# Altium PCB ControlPCB.PcbDoc
Units mil, origin at the board's own origin, x right, y up, seen from the top; angles counter-clockwise.
Board outline 1995 x 2235 mil, 2 copper layers (Top Layer, Bottom Layer); 21 components, 27 nets, 95 pads, 2 vias.
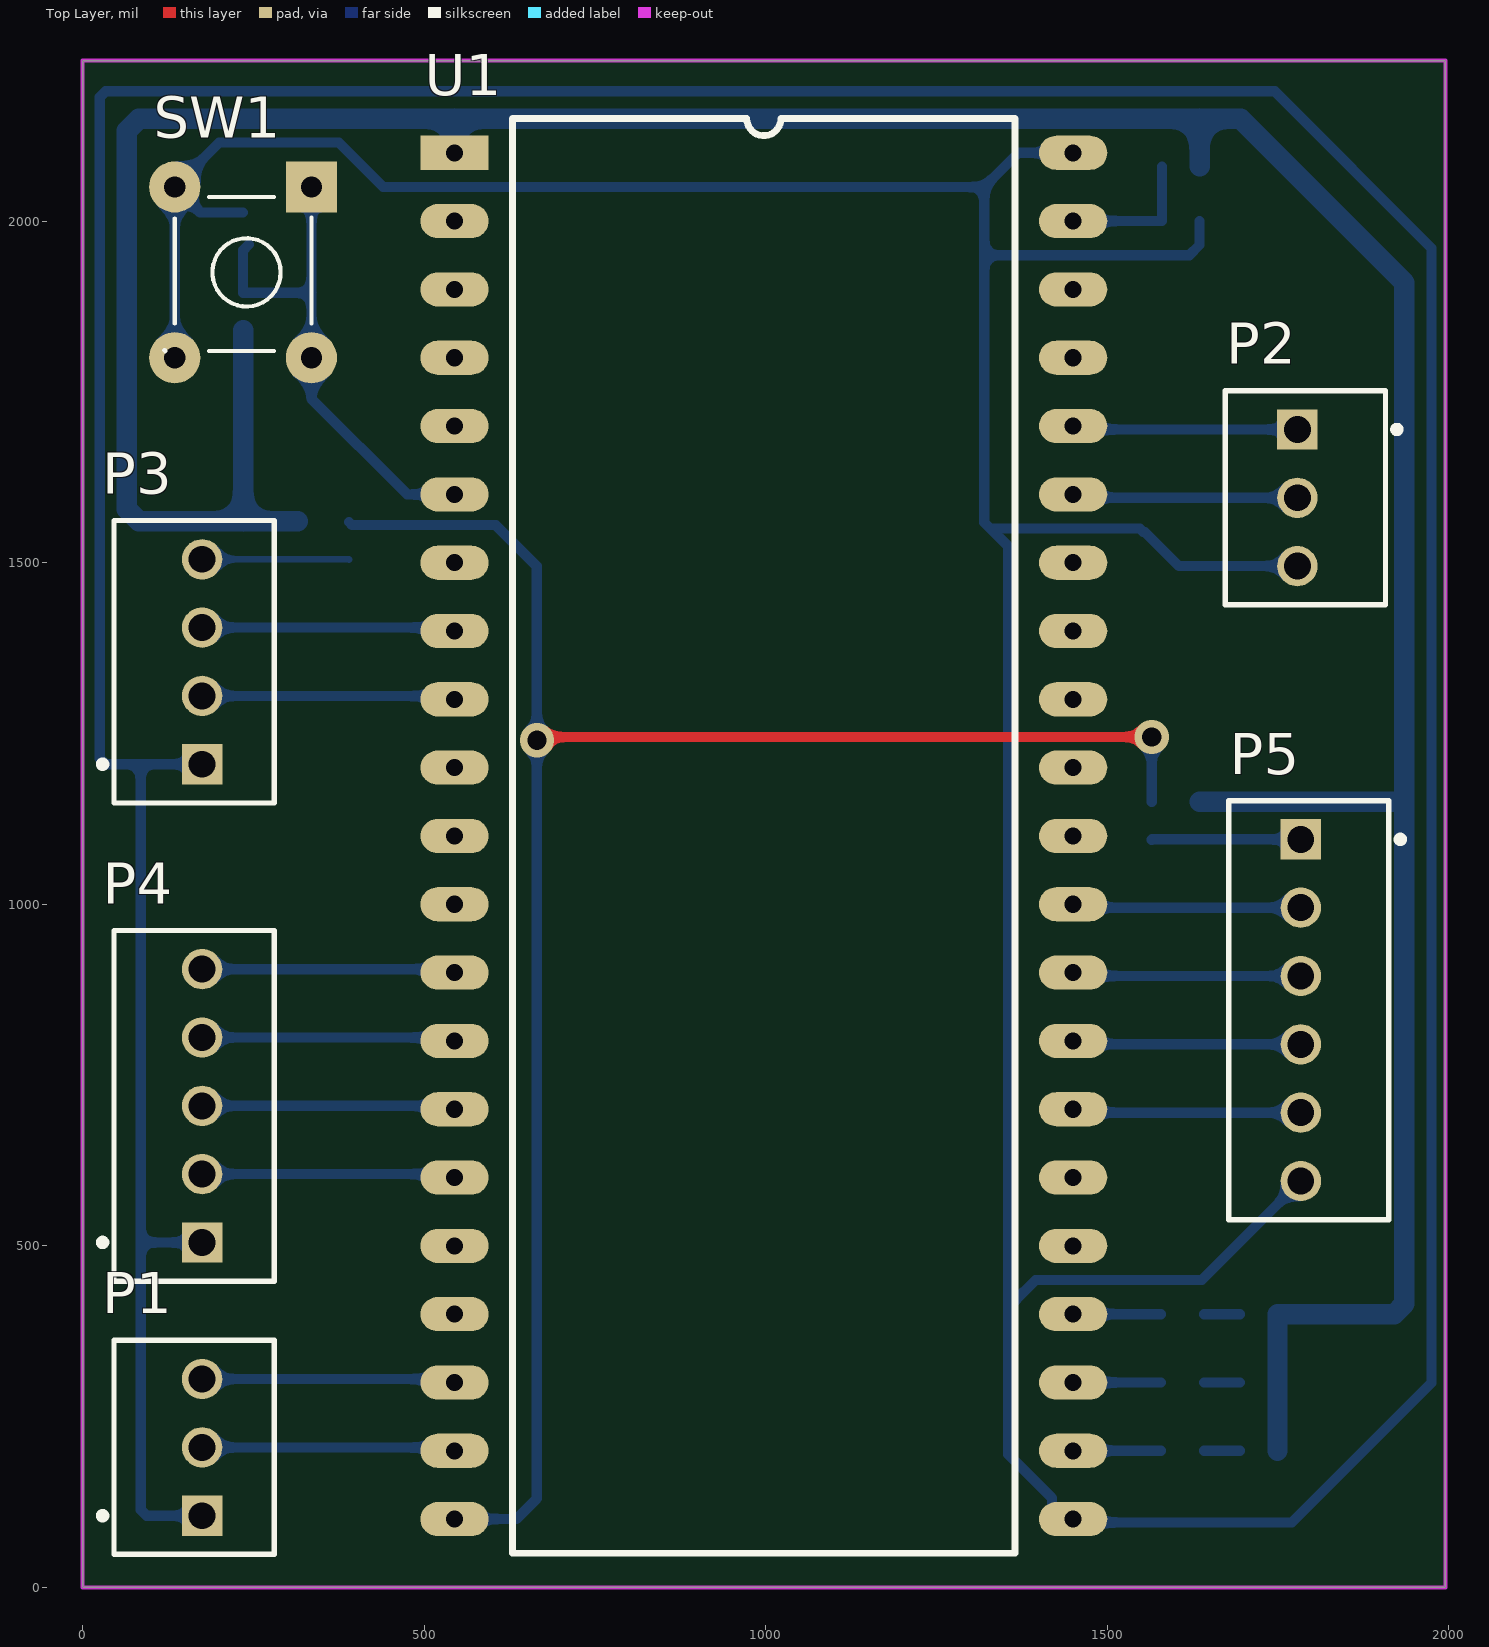
[diagram p0: Top Layer view]
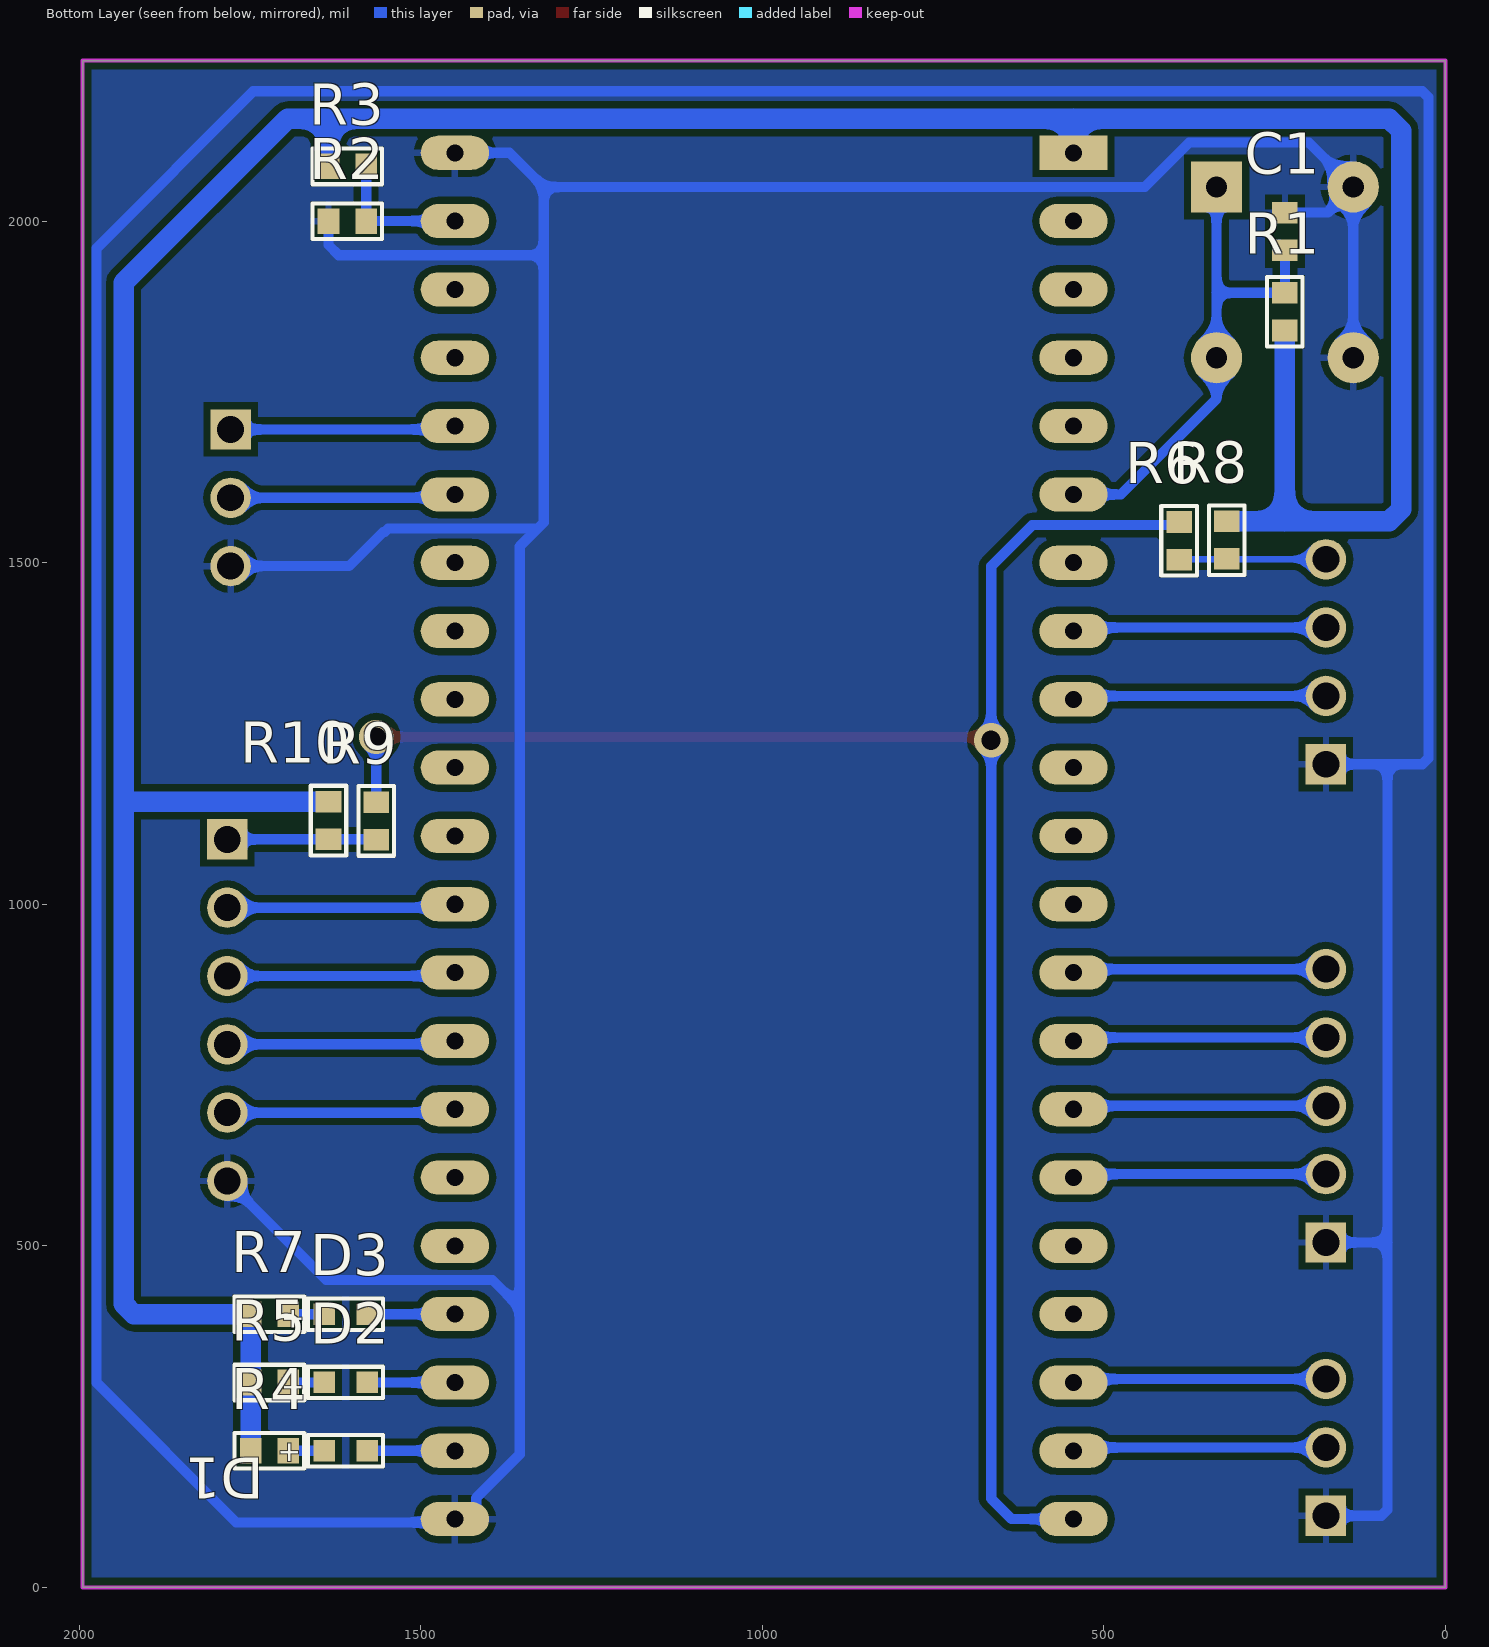
[diagram p1: Bottom Layer view, seen from below]
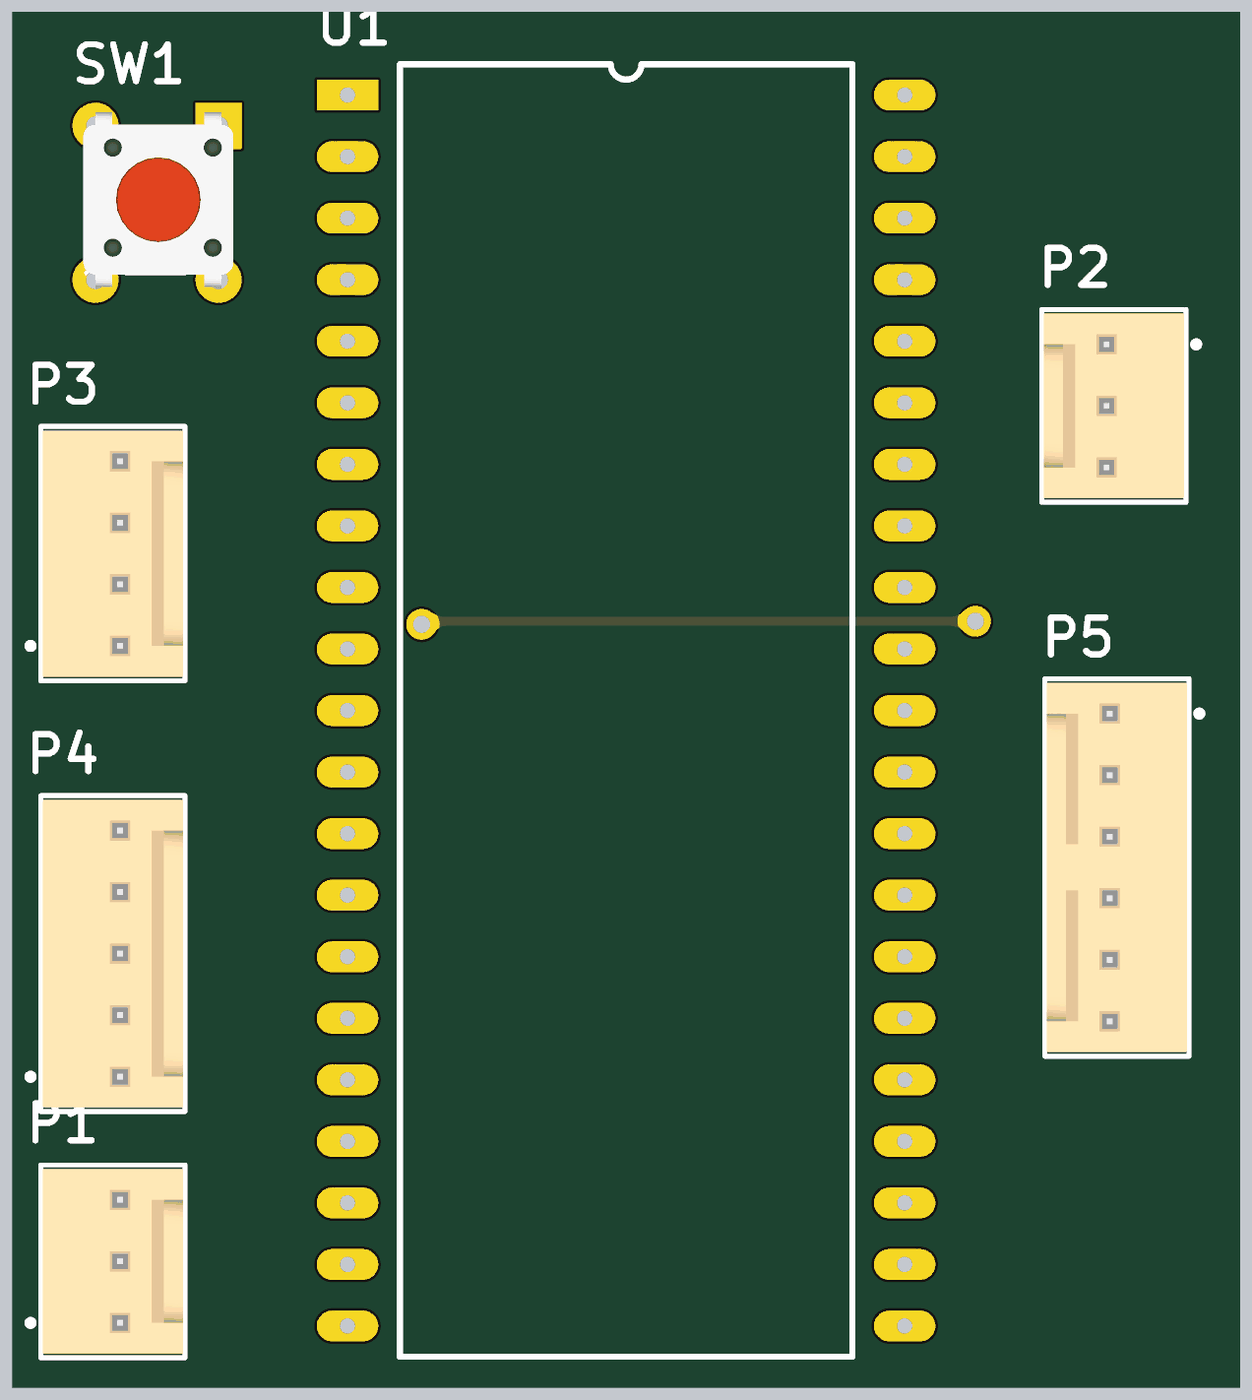
[diagram p2: 3D render of the assembled board from above, using the file's embedded part models]
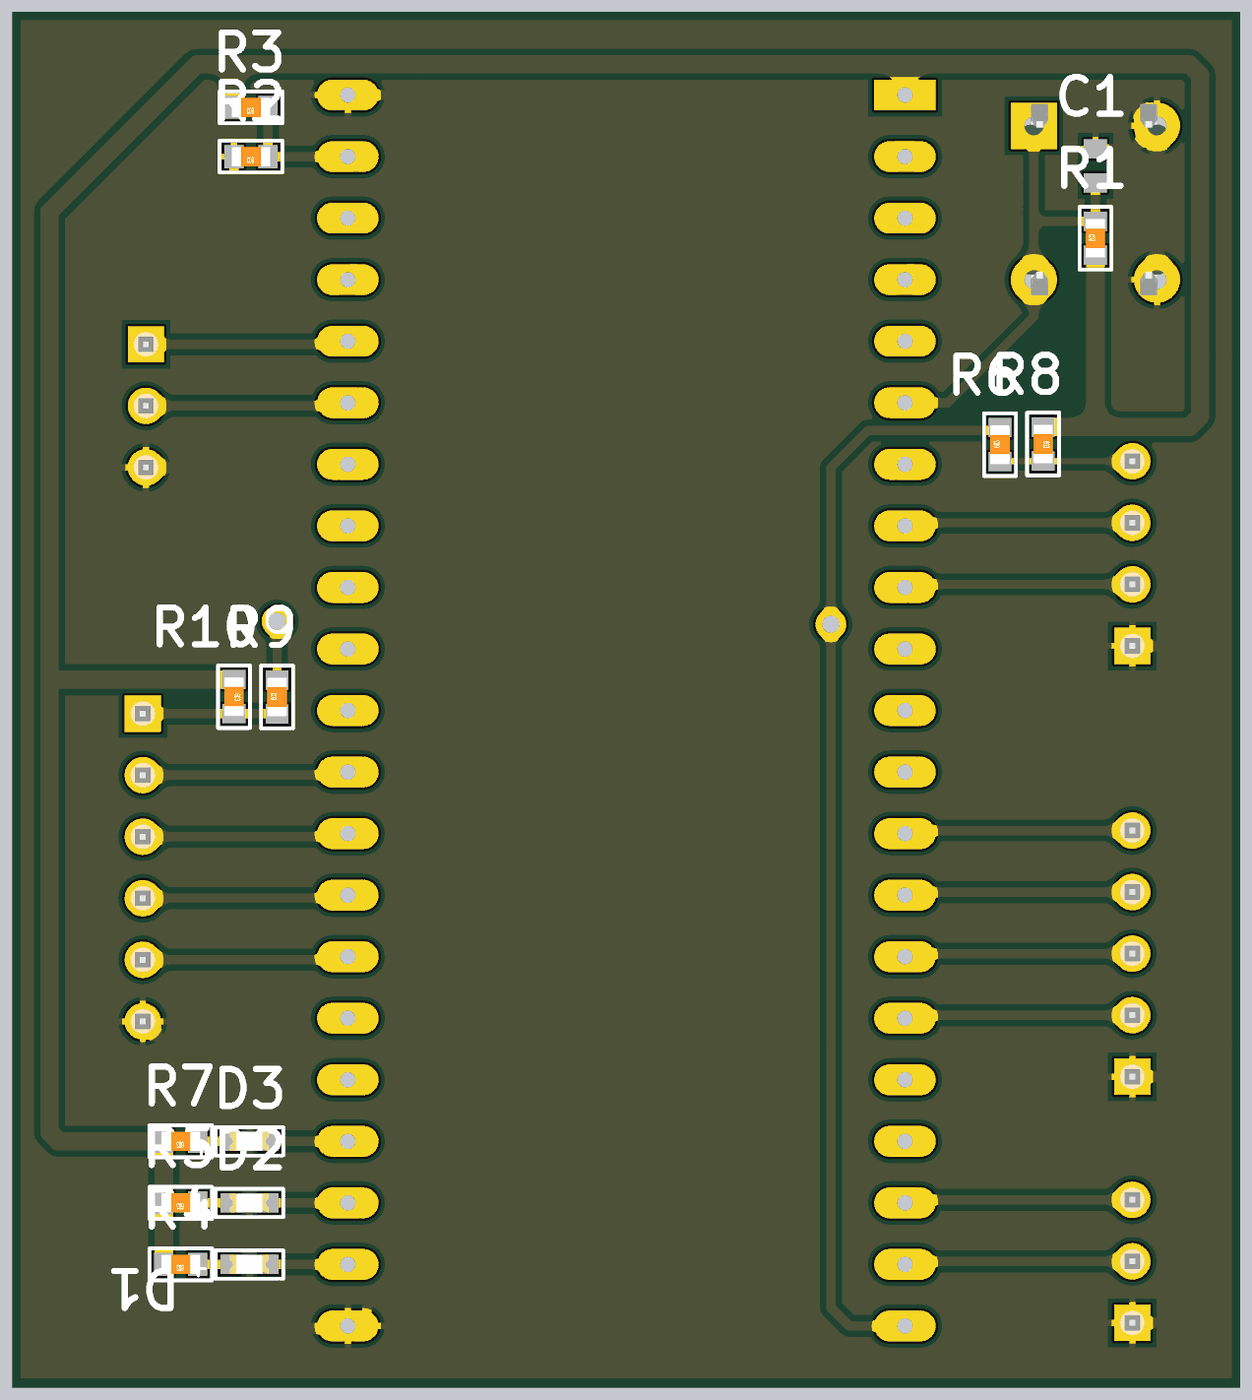
[diagram p3: 3D render of the assembled board from below, using the file's embedded part models]

## Layer stack, top to bottom
Top Solder: solder mask 0.4, Solder Resist, Dk 3.5
Top Layer: signal copper 1.4
Dielectric 1: dielectric 12.6, FR-4, Dk 4.8
Bottom Layer: signal copper 1.4
Bottom Solder: solder mask 0.4, Solder Resist, Dk 3.5

## Board outline
0,0 0,2235 1995,2235 1995,0

## Design rules (kind name [scope] priority, off if disabled: settings)
Clearance [All] p1: gap=10 ignorepadtopadclearanceinfootprint=FALSE
PolygonConnect [All] p1: connectstyle=Relief reliefconductorwidth=10 reliefentries=4 polygonreliefangle="90 Angle" airgapwidth=10
RoutingVias [All] p1: holewidth=28 width=50 viastyle="Through Hole" minholewidth=28 minwidth=50 maxholewidth=28 maxwidth=50
SolderMaskExpansion [All] p1: expansion=4 istentingtop=FALSE
Width [All] p1: maxlimit=30 minlimit=10 preferedwidth=15
30 further rules are at their usual default settings.

## Components (designator, comment, footprint, x,y, rotation, side; value= is the part's Value field where it differs from the comment)
C1 "Cap Non-Pol SMD" CAP-SM-0603 235,1985 r90 bottom value=100nF
D1 "Amber, 2V" WL-SMCW_0603_H=0.7mm 1610,200 r0 bottom
D2 "Red, 2V" WL-SMCW_0603_H=0.7mm 1610,300 r0 bottom
D3 "Blue, 3.2V" WL-SMCW_0603_H=0.7mm 1610,400 r0 bottom
P1 "61900311121" 61900311121 163.19,205 r270 top
P2 "61900311121" 61900311121 1790,1595 r90 top
P3 "61900411121" 61900411121 163.19,1355 r270 top
P4 "61900511121" 61900511121 163.19,705 r270 top
P5 "61900611121" 61900611121 1795,845 r90 top
R1 "RESISTOR SMD" RES-SM-0603 235,1840.44 r90 bottom value=10K
R2 "RESISTOR SMD" RES-SM-0603 1580.44,2000 r0 bottom value=DNM
R3 "RESISTOR SMD" RES-SM-0603 1580.44,2080 r0 bottom value=DNM
R4 "RESISTOR SMD" RES-SM-0603 1694.56,200 r0 bottom value=330
R5 "RESISTOR SMD" RES-SM-0603 1694.56,300 r0 bottom value=330
R6 "RESISTOR SMD" RES-SM-0603 390,1505 r90 bottom value=0
R7 "RESISTOR SMD" RES-SM-0603 1694.56,400 r0 bottom value=330
R8 "RESISTOR SMD" RES-SM-0603 320,1560 r270 bottom value=DNM
R9 "RESISTOR SMD" RES-SM-0603 1565,1095 r90 bottom value=0
R10 "RESISTOR SMD" RES-SM-0603 1635,1149.56 r270 bottom value=DNM
SW1 "SW" "Tact SW 4 pin" 335,2050 r270 top value="Button chip 4 pin"
U1 "ESP32_S2" ESP32_S2 544.49,2100 r0 top

## Footprints (in the part's own frame and the unit in brackets; to place one, negate y for a bottom-side part, rotate by r counter-clockwise, add the part's x,y. Pads: shape width x height; smd on the part's side, far side on the other; paste and mask are expansions set on the pad)
61900311121 [mm] "2.54mm Male Locking Header, 3p"
  rect 1.5x1.5 hole 1: 1(2.54,0.3)
  round 1.5 hole 1: 2(0,0.3) 3(-2.54,0.3)
  silkscreen extent -3.98,-3.52 3.98,2.98, body extent -3.81,-2.9 3.81,2.9, height 11.53
61900411121 [mm] "2.54mm Male Locking Header, 4p"
  rect 1.5x1.5 hole 1: 1(3.81,0.3)
  round 1.5 hole 1: 2(1.27,0.3) 3(-1.27,0.3) 4(-3.81,0.3)
  silkscreen extent -5.25,-3.52 5.25,2.98, body extent -5.08,-2.9 5.08,2.9, height 11.53
61900511121 [mm] "2.54mm Male Locking Header, 5p"
  rect 1.5x1.5 hole 1: 1(5.08,0.3)
  round 1.5 hole 1: 2(2.54,0.3) 3(0,0.3) 4(-2.54,0.3) 5(-5.08,0.3)
  silkscreen extent -6.52,-3.52 6.52,2.98, body extent -6.35,-2.9 6.35,2.9, height 11.53
61900611121 [mm] "2.54mm Male Locking Header, 6p"
  rect 1.5x1.5 hole 1: 1(6.35,0.3)
  round 1.5 hole 1: 2(3.81,0.3) 3(1.27,0.3) 4(-1.27,0.3) 5(-3.81,0.3) 6(-6.35,0.3)
  silkscreen extent -7.79,-3.52 7.79,2.98, body extent -7.62,-2.9 7.62,2.9, height 11.53
CAP-SM-0603 [mm] "SMD Ceramic Capacitor Size 0603"
  rect 0.8x0.95 smd: 1(-0.7,0) 2(0.7,0)
  body extent -0.85,-0.45 0.85,0.45, height 0.6
ESP32_S2 [mm]
  rect 2.54x1.27 hole 0.635: 1(0,0)
  oval 2.54x1.27 hole 0.635: 2(0,-2.54) 3(0,-5.08) 4(0,-7.62) 5(0,-10.16) 6(0,-12.7) 7(0,-15.24) 8(0,-17.78) 9(0,-20.32) 10(0,-22.86) 11(0,-25.4) 12(0,-27.94) 13(0,-30.48) 14(0,-33.02) 15(0,-35.56) 16(0,-38.1) 17(0,-40.64) 18(0,-43.18) 19(0,-45.72) 20(0,-48.26) 21(0,-50.8) 22(23,-50.8) 23(23,-48.26) 24(23,-45.72) 25(23,-43.18) 26(23,-40.64) 27(23,-38.1) 28(23,-35.56) 29(23,-33.02) 30(23,-30.48) 31(23,-27.94) 32(23,-25.4) 33(23,-22.86) 34(23,-20.32) 35(23,-17.78) 36(23,-15.24) 37(23,-12.7) 38(23,-10.16) 39(23,-7.62) 40(23,-5.08) 41(23,-2.54) 42(23,0)
  silkscreen extent 2.16,-52.07 20.84,1.27
RES-SM-0603 [mm]
  rect 0.8x0.95 smd: 1(-0.014,0) 2(1.386,0)
  silkscreen extent -0.61,-0.66 1.98,0.66, body extent -0.11,-0.4 1.49,0.4, height 0.3
"Tact SW 4 pin" [mil] "SW button 4pin, 250 x250 mil"
  rect 75x75 hole 31: 1(0,0)
  round 75 hole 31: 2(250,-200) 3(250,0) 4(0,-200)
  silkscreen extent 15,-215 240,0, body extent -36,-220 276,24, height 276
WL-SMCW_0603_H=0.7mm [mm] "SMD Mono-color Chip LED, body 1.6x0.8mm"
  rect 0.8x0.8 smd: 1(-0.8,0) 2(0.8,0)
  silkscreen extent -1.4,-0.58 1.4,0.58, body extent -0.8,-0.4 0.8,0.4, height 0.7

## Part data
C1: "Capacitor"
D1: library part 150060AS75000, "WL-SMCW SMT Mono-color Chip LED Waterclear, size 0603, Amber, 2V, 140deg", Emitting Color=Amber, Forward Voltage typ.=2V, Operating Temperature="-40 to +85degC", Chip Technology=AlInGaP, ComponentLink1Description=Manufacturer, ComponentLink1URL=http://www.we-online.de, ComponentLink2Description=Datasheet, ComponentLink2URL=https://www.we-online.com/catalog/datasheet/150060AS75000.pdf, Dominant Wavelength typ.=605nm, Luminous Intensity typ.=130mcd, Mounting Technology=SMT, Packaging="Tape and Reel", Part Number=150060AS75000, Peak Wavelength typ.=610nm, Published Date="December 2019", Publisher="Wurth Elektronik", Size=0603, Viewing Angle=140deg
D2: library part 150060RS75000, "WL-SMCW SMT Mono-color Chip LED Waterclear, size 0603, Red, 2V, 140deg", Emitting Color=Red, Forward Voltage typ.=2V, Operating Temperature="-40 to +85degC", Chip Technology=AlInGaP, ComponentLink1Description=Manufacturer, ComponentLink1URL=http://www.we-online.de, ComponentLink2Description=Datasheet, ComponentLink2URL=https://www.we-online.com/catalog/datasheet/150060RS75000.pdf, Dominant Wavelength typ.=625nm, Luminous Intensity typ.=250mcd, Mounting Technology=SMT, Packaging="Tape and Reel", Part Number=150060RS75000, Peak Wavelength typ.=630nm, Published Date="December 2019", Publisher="Wurth Elektronik", Size=0603, Viewing Angle=140deg
D3: library part 150060BS75000, "WL-SMCW SMT Mono-color Chip LED Waterclear, size 0603, Blue, 3.2V, 140deg", Emitting Color=Blue, Forward Voltage typ.=3.2V, Operating Temperature="-40 to +85degC", Chip Technology=InGaN, ComponentLink1Description=Manufacturer, ComponentLink1URL=http://www.we-online.de, ComponentLink2Description=Datasheet, ComponentLink2URL=https://www.we-online.com/catalog/datasheet/150060BS75000.pdf, Dominant Wavelength typ.=470nm, Luminous Intensity typ.=145mcd, Mounting Technology=SMT, Packaging="Tape and Reel", Part Number=150060BS75000, Peak Wavelength typ.=465nm, Published Date="December 2019", Publisher="Wurth Elektronik", Size=0603, Viewing Angle=140deg
P1 P2: "WR-WTB THT Male Vertical Locking Header, pitch 2.54mm, 3p", Contact Resistance=20mOhm, Operating Temperature="-40 to +105degC", Rated Current=3A, Withstanding Voltage=1000VAC, Working Voltage=250VAC, ComponentLink1Description=Manufacturer, ComponentLink1URL=http://www.we-online.de, ComponentLink2Description=Datasheet, ComponentLink2URL=https://www.we-online.com/catalog/datasheet/61900311121.pdf, Gender=Male, Mounting Technology=THT, Packaging=Bag, Part Number=61900311121, Pin Number=3, Pitch=2.54mm, Published Date="January 2020", Publisher="Wurth Elektronik", Type=Vertical
P3: "WR-WTB THT Male Vertical Locking Header, pitch 2.54mm, 4p", Contact Resistance=20mOhm, Operating Temperature="-40 to +105degC", Rated Current=3A, Withstanding Voltage=1000VAC, Working Voltage=250VAC, ComponentLink1Description=Manufacturer, ComponentLink1URL=http://www.we-online.de, ComponentLink2Description=Datasheet, ComponentLink2URL=https://www.we-online.com/catalog/datasheet/61900411121.pdf, Gender=Male, Mounting Technology=THT, Packaging=Bag, Part Number=61900411121, Pin Number=4, Pitch=2.54mm, Published Date="January 2020", Publisher="Wurth Elektronik", Type=Vertical
P4: "WR-WTB THT Male Vertical Locking Header, pitch 2.54mm, 5p", Contact Resistance=20mOhm, Operating Temperature="-40 to +105degC", Rated Current=3A, Withstanding Voltage=1000VAC, Working Voltage=250VAC, ComponentLink1Description=Manufacturer, ComponentLink1URL=http://www.we-online.de, ComponentLink2Description=Datasheet, ComponentLink2URL=https://www.we-online.com/catalog/datasheet/61900511121.pdf, Gender=Male, Mounting Technology=THT, Packaging=Bag, Part Number=61900511121, Pin Number=5, Pitch=2.54mm, Published Date="January 2020", Publisher="Wurth Elektronik", Type=Vertical
P5: "WR-WTB THT Male Vertical Locking Header, pitch 2.54mm, 6p", Contact Resistance=20mOhm, Operating Temperature="-40 to +105degC", Rated Current=3A, Withstanding Voltage=1000VAC, Working Voltage=250VAC, ComponentLink1Description=Manufacturer, ComponentLink1URL=http://www.we-online.de, ComponentLink2Description=Datasheet, ComponentLink2URL=https://www.we-online.com/catalog/datasheet/61900611121.pdf, Gender=Male, Mounting Technology=THT, Packaging=Bag, Part Number=61900611121, Pin Number=6, Pitch=2.54mm, Published Date="January 2020", Publisher="Wurth Elektronik", Type=Vertical
R1 R2 R3 R4 R5 R6 R7 R8 R9 R10: "Resistor"
SW1: library part "Tact SW - 4Pin", "Switch button 4 pin"

## Via types
v1: diameter 50, hole 28, Top Layer to Bottom Layer, 2 vias

## Nets (pads, with @x,y where several pads share a name; then routed paths per layer and width w, separated by ;. In a path a pad name is that pad's centre, name@x,y a point inside that pad or via, vN(x,y) a via of type N, cw(c..) or ccw(c..) an arc to the next point about the centre after c; other vN are vias at no path point)
3.3V: R1.1 R3.2 R4.2 R5.2 R7.2 R8.1 R10.1 U1.1 | length 5374.4
  Bottom Layer w30: R1.1 235,1560.56 ; R8.1@314.65,1560.56 235,1560.56 ; U1.1 544.49,2150 ; R10.1 1934.88,1150.12 1935,1150 ; R3.2 1635,2150 ; R4.2 R5.2 R7.2 1920,400 1935,415 1935,1150 ; 235,1560.56 82.57,1560.56 65,1578.13 65,2132.43 82.57,2150 544.49,2150 ; 544.49,2150 1635,2150 ; 1635,2150 1695,2150 1935,1910 1935,1150
+5: R6.2 R9.2 U1.21 | length 2797.2
  Top Layer w15: v1(665,1240) 670,1245 v1(1565,1245)
  Bottom Layer w15: R6.2 394.56,1555 605,1555 665,1495 v1(665,1240) 665,130 635,100 U1.21 ; R9.2 v1(1565,1245)
BTN_ESP32: C1.1 R1.2 SW1.1 SW1.3 U1.6 | length 751.6
  Bottom Layer w15: C1.1@243.25,1965.69 C1.1 R1.2 335,1895 ; SW1.1 335,1895 ; U1.6 475,1600 335,1740 SW1.3 335,1895
EN: R2.1 R3.1 U1.41 | length 209.9
  Bottom Layer w15: U1.41 R2.1 R3.1
GND: C1.2 P1.1 P2.3 P3.1 P4.1 P5.6 R2.2 SW1.2 SW1.4 U1.22 U1.42 | length 11817.3
  Bottom Layer w15: SW1.2 SW1.4 ; P1.1 93.79,105 85,113.79 85,505 ; P4.1 85,505 ; P3.1 85,1205 ; C1.2 172.44,2012.56 SW1.4 ; U1.42 1370,2100 1320,2050 ; R2.2 1635,1965 1620,1950 1320,1950 ; P2.3 1605,1495 1555,1545 1552.5,1545 1547.5,1550 1328.79,1550 ; P5.6 1638.19,450 1395,450 1355,410 ; 85,505 85,1205 ; 85,1205 33.79,1205 25,1213.79 25,2181.21 33.79,2190 1745,2190 1974.5,1960.5 1974.5,299.5 1770,95 1455,95 U1.22 1435.08,100 1418.91,116.17 1418.91,131.09 1355,195 1355,410 ; SW1.4 200,2115 375,2115 440,2050 1320,2050 ; 1320,1950 1320,1558.79 1328.79,1550 ; 1320,1950 1320,2050 ; 1328.79,1550 1355,1523.79 1355,410
LED_1: D1.1 U1.23 | length 128.5
  Bottom Layer w15: U1.23 D1.1
LED_2: D2.1 U1.24 | length 128.5
  Bottom Layer w15: U1.24 D2.1
LED_3: D3.1 U1.25 | length 128.5
  Bottom Layer w15: U1.25 D3.1
MISO: P5.2 U1.31 | length 335.3
  Bottom Layer w15: U1.31 1455,995 P5.2
MOSI: P5.4 U1.29 | length 335.3
  Bottom Layer w15: U1.29 1455,795 P5.4
NetD1_2: D1.2 R4.1 | length 52.5
  Bottom Layer w15: D1.2 R4.1
NetD2_2: D2.2 R5.1 | length 52.5
  Bottom Layer w15: D2.2 R5.1
NetD3_2: D3.2 R7.1 | length 52.5
  Bottom Layer w15: D3.2 R7.1
NetP3_4: P3.4 R6.1 R8.2 | length 215.2
  Bottom Layer w10: P3.4 389.44,1505 R6.1
NetP4_2: P4.2 U1.16 | length 371.6
  Bottom Layer w15: P4.2 539.49,605 U1.16
NetP4_3: P4.3 U1.15 | length 371.6
  Bottom Layer w15: P4.3 539.49,705 U1.15
NetP4_4: P4.4 U1.14 | length 371.6
  Bottom Layer w15: P4.4 539.49,805 U1.14
NetP4_5: P4.5 U1.13 | length 371.6
  Bottom Layer w15: P4.5 539.49,905 U1.13
NetP5_1: P5.1 R9.1 R10.2 | length 218.4
  Bottom Layer w15: R9.1 1565.56,1095 R10.2 P5.1
RX_0: P2.1 U1.38 | length 330.3
  Bottom Layer w15: U1.38 1455,1695 P2.1
RX_1: P1.2 U1.20 | length 371.6
  Bottom Layer w15: P1.2 539.49,205 U1.20
SCK: P5.3 U1.30 | length 335.3
  Bottom Layer w15: U1.30 1455,895 P5.3
SCL: P3.2 U1.9 | length 371.6
  Bottom Layer w15: P3.2 539.49,1305 U1.9
SDA: P3.3 U1.8 | length 371.6
  Bottom Layer w15: P3.3 539.49,1405 U1.8
SS: P5.5 U1.28 | length 335.3
  Bottom Layer w15: U1.28 1455,695 P5.5
TX_0: P2.2 U1.37 | length 330.3
  Bottom Layer w15: U1.37 1455,1595 P2.2
TX_1: P1.3 U1.19 | length 371.6
  Bottom Layer w15: P1.3 539.49,305 U1.19
pads on no net: U1.2 U1.3 U1.4 U1.5 U1.7 U1.10 U1.11 U1.12 U1.17 U1.18 U1.26 U1.27 U1.32 U1.33 U1.34 U1.35 U1.36 U1.39 U1.40

## Polygon pours and split planes (outlines as drawn)
GND on Bottom Layer "GND_L02_P000" (solid, remove dead copper, pour order 0): 0,15 0,2235 1995,2235 1995,15

## Keep-outs
Keep-Out Layer:
  the board outline again, w6

## Text inside footprints (layer, text, board x,y; h text height)
D1: Bottom Overlay "+" at 1705,215 h30 r90
D2: Bottom Overlay "+" at 1700,310 h30 r90
D3: Bottom Overlay "+" at 1700,410 h30 r90